# Altium PCB Diplomski.PcbDoc (part 1 of 2)
Units mm, origin at the board's own origin, x right, y up, seen from the top; angles counter-clockwise.
Board outline 40.1 x 36.5 mm, 4 copper layers (Top Layer, Layer 1, Layer 2, Bottom Layer), stack 1.592 mm thick; 128 components, 110 nets, 388 pads, 149 vias.
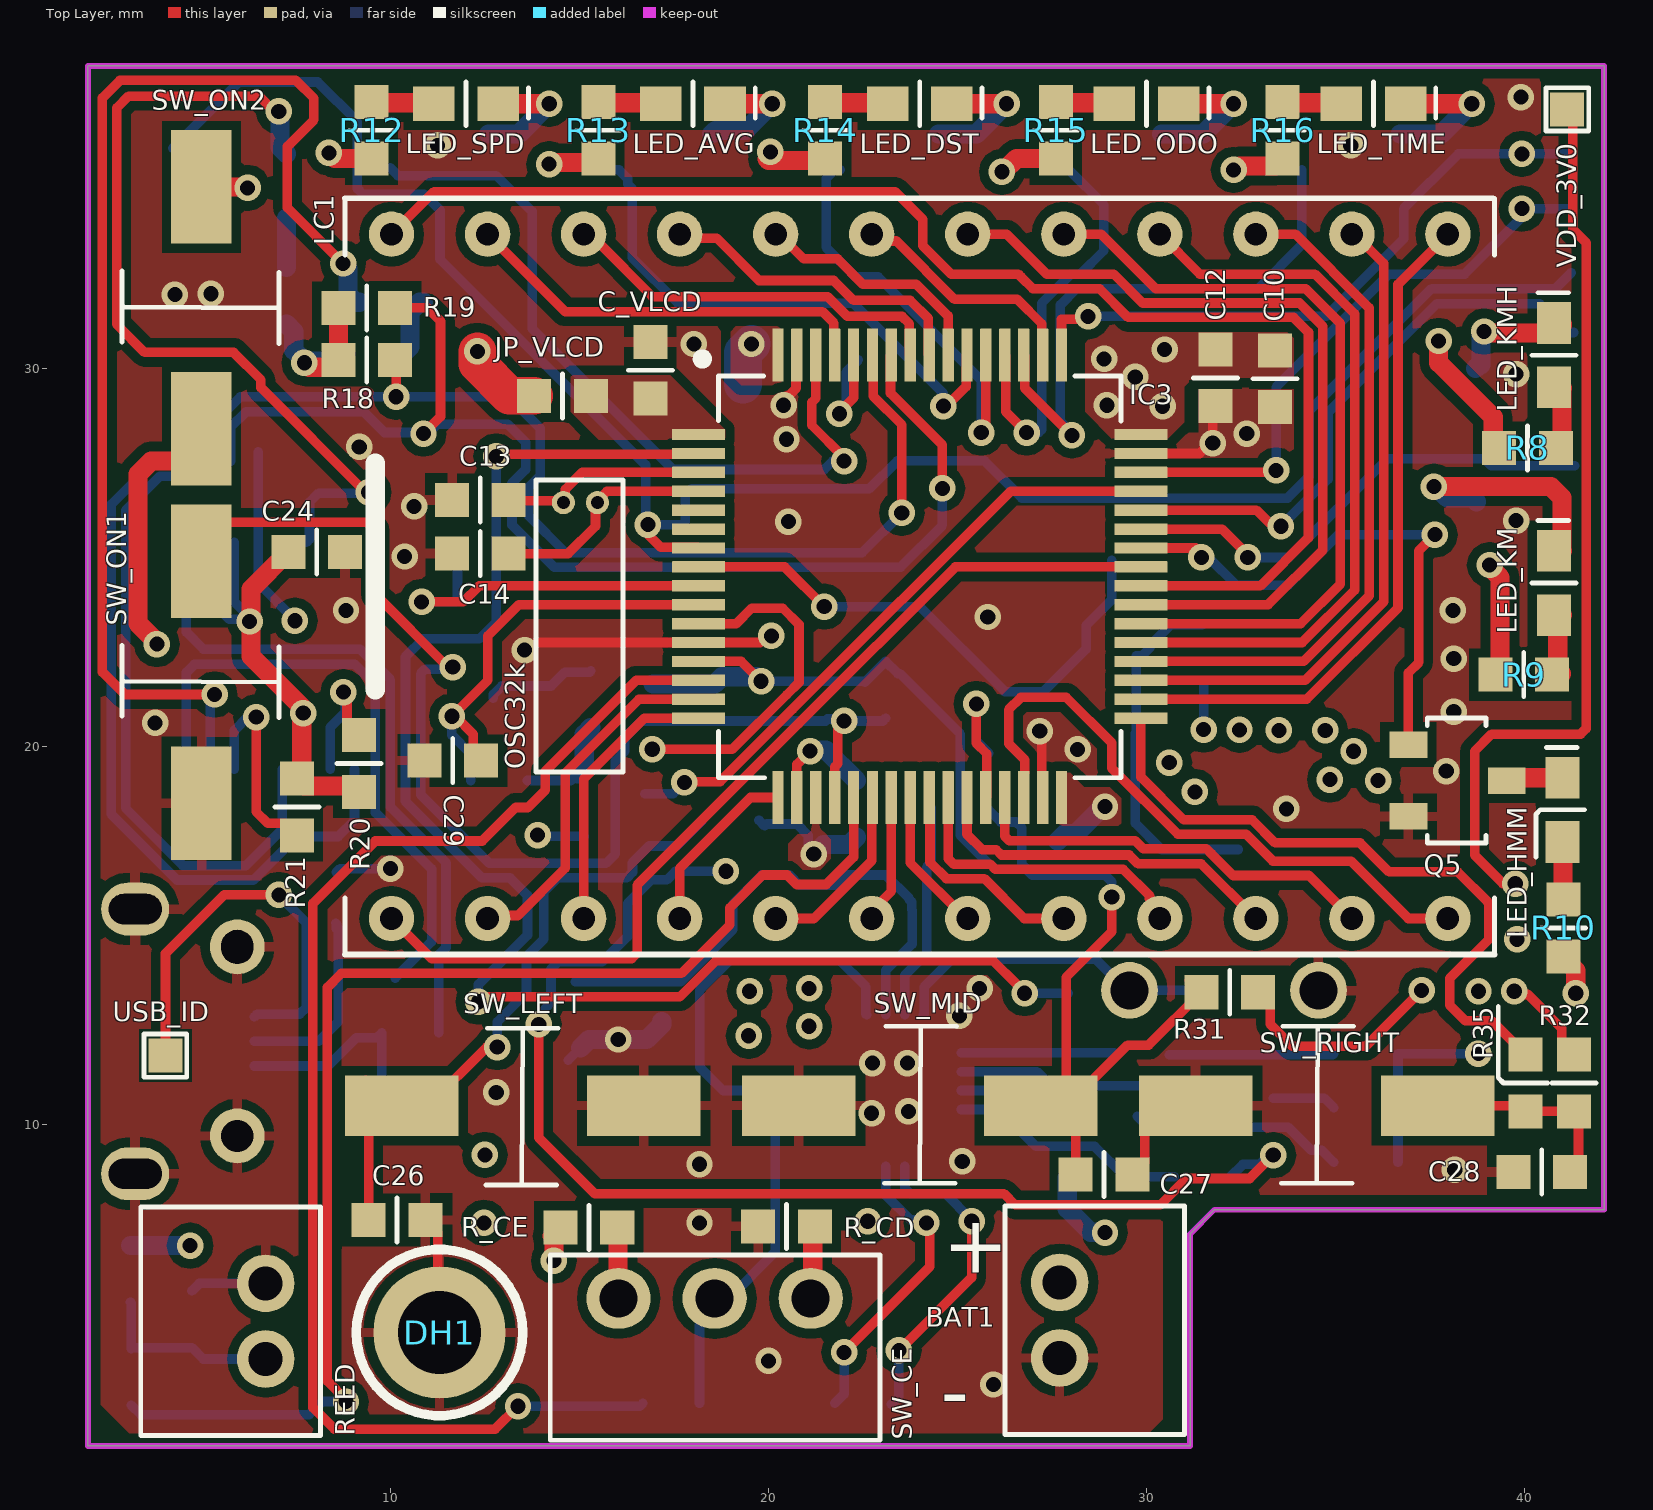
[diagram p0: Top Layer view]
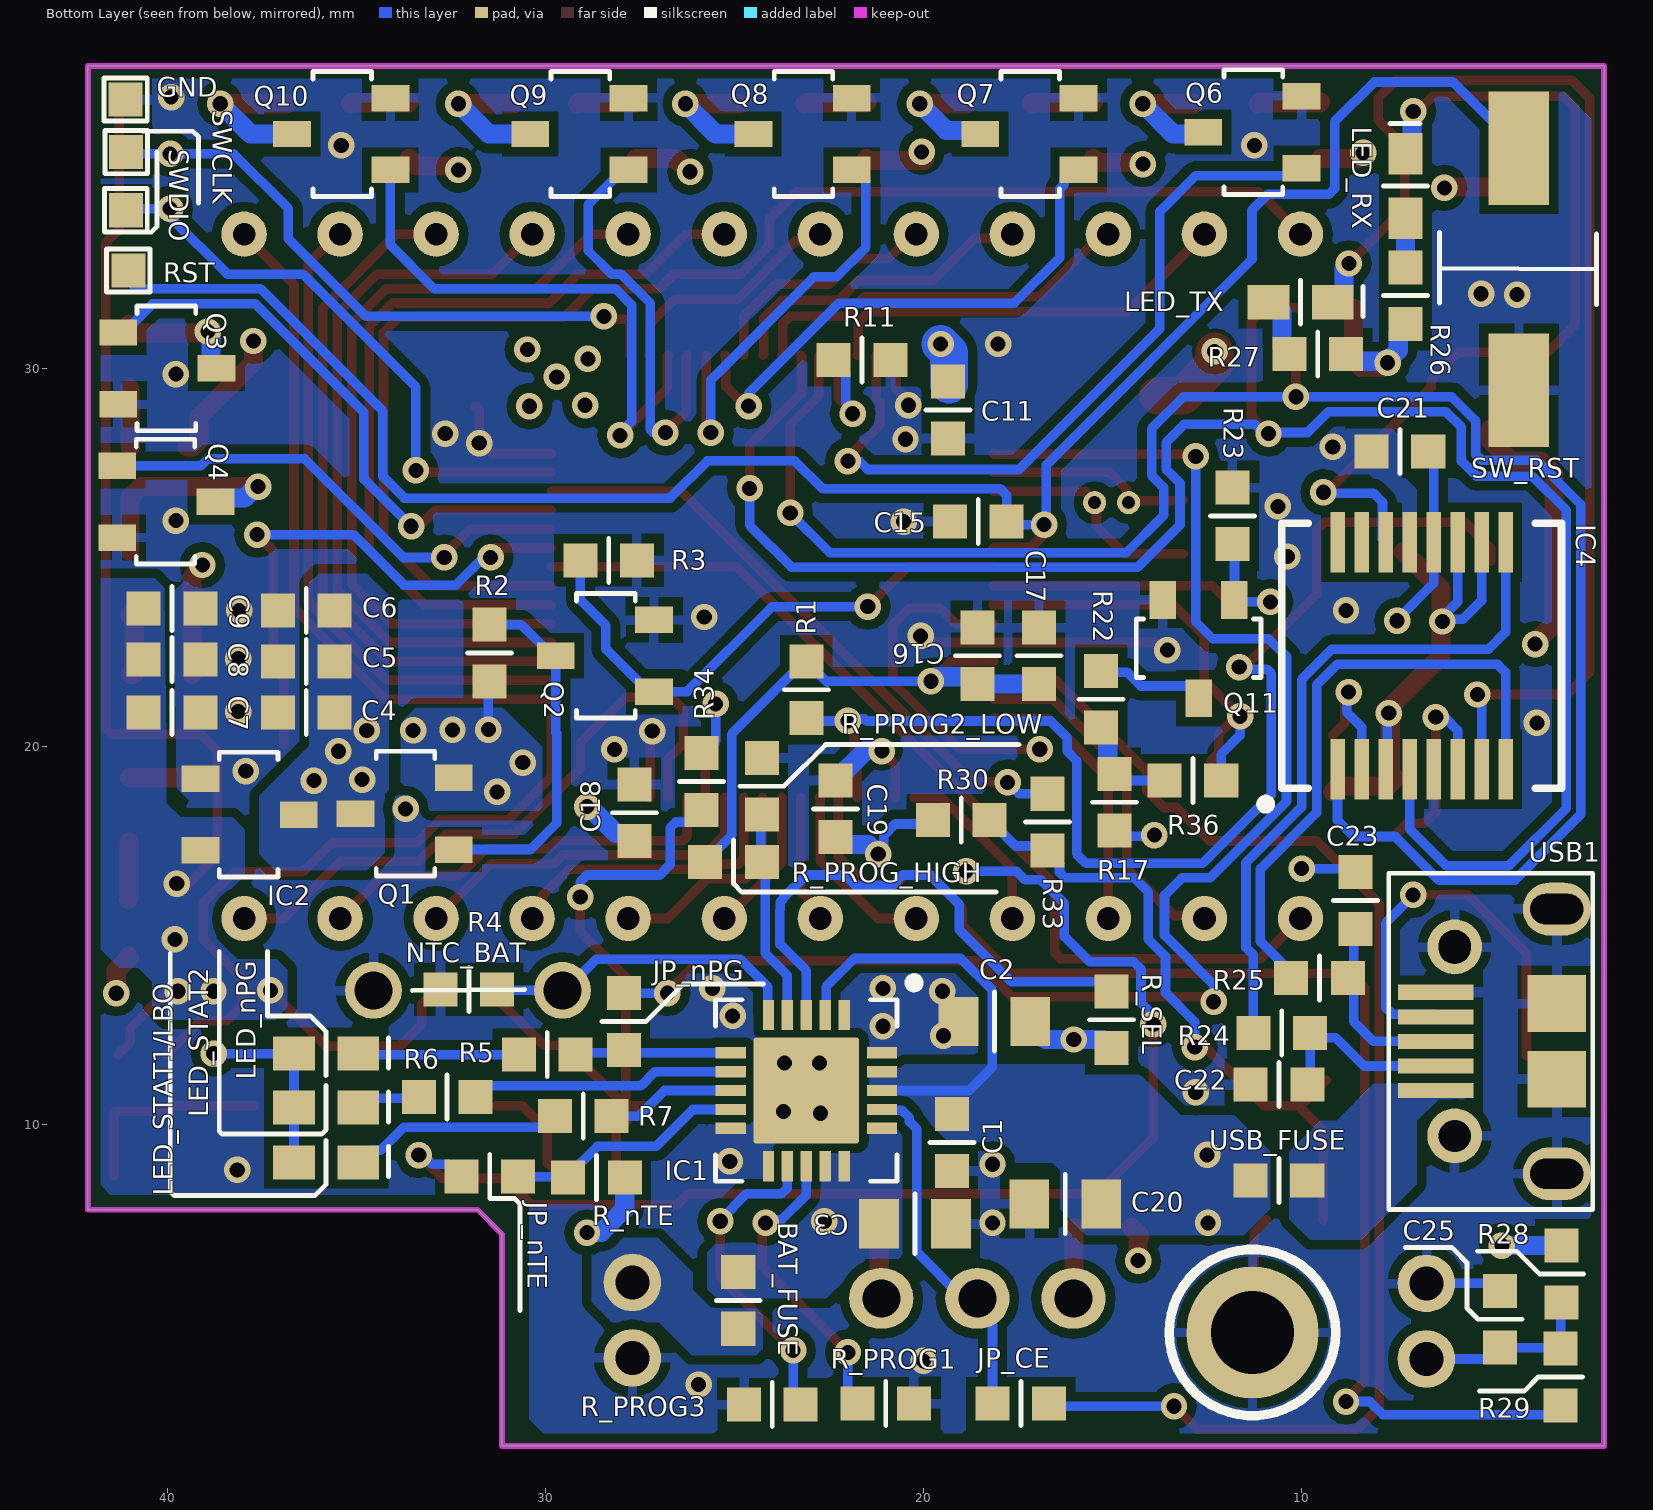
[diagram p1: Bottom Layer view, seen from below]
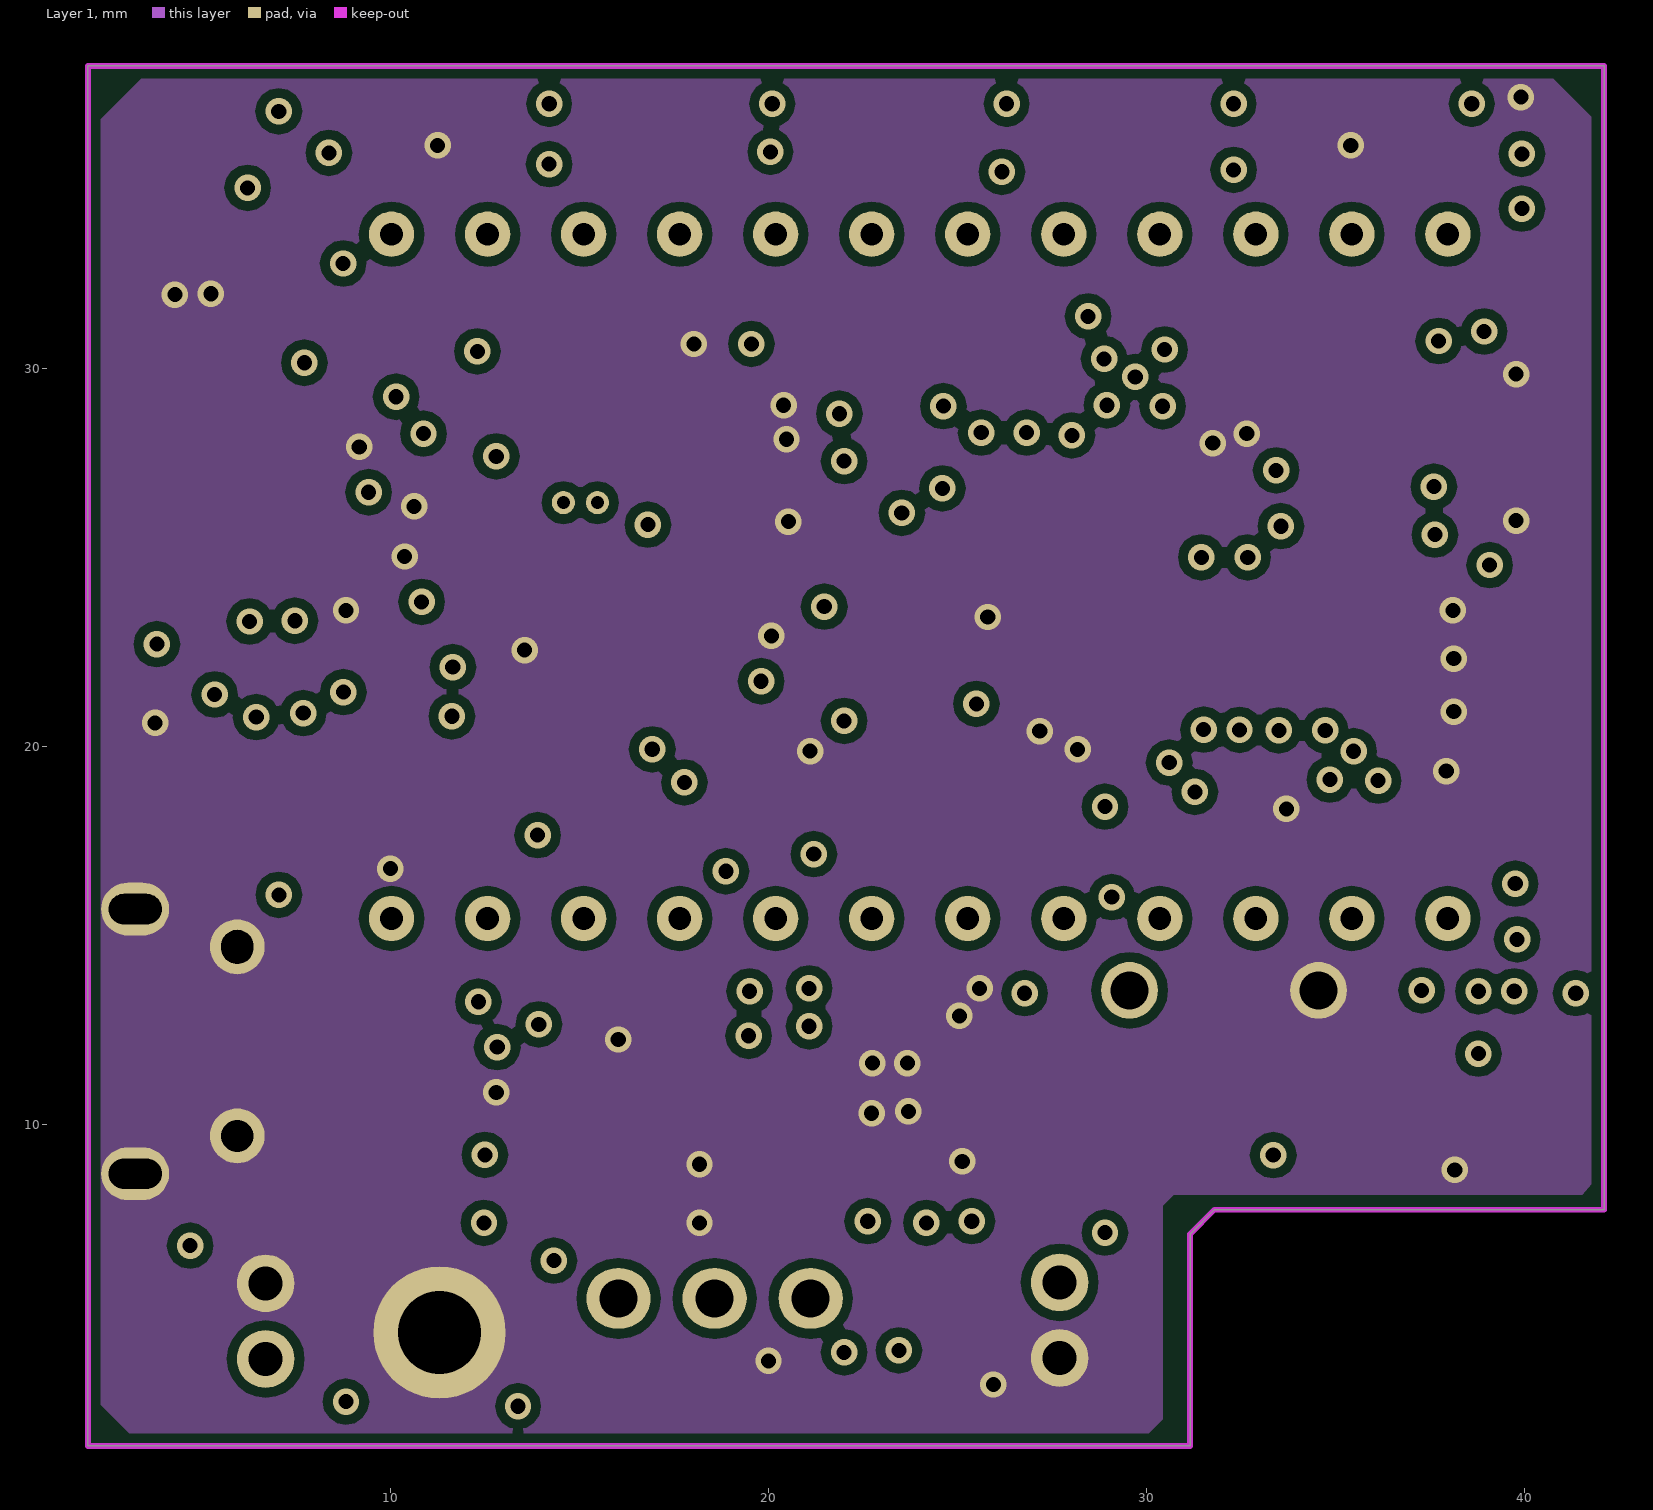
[diagram p2: Layer 1]
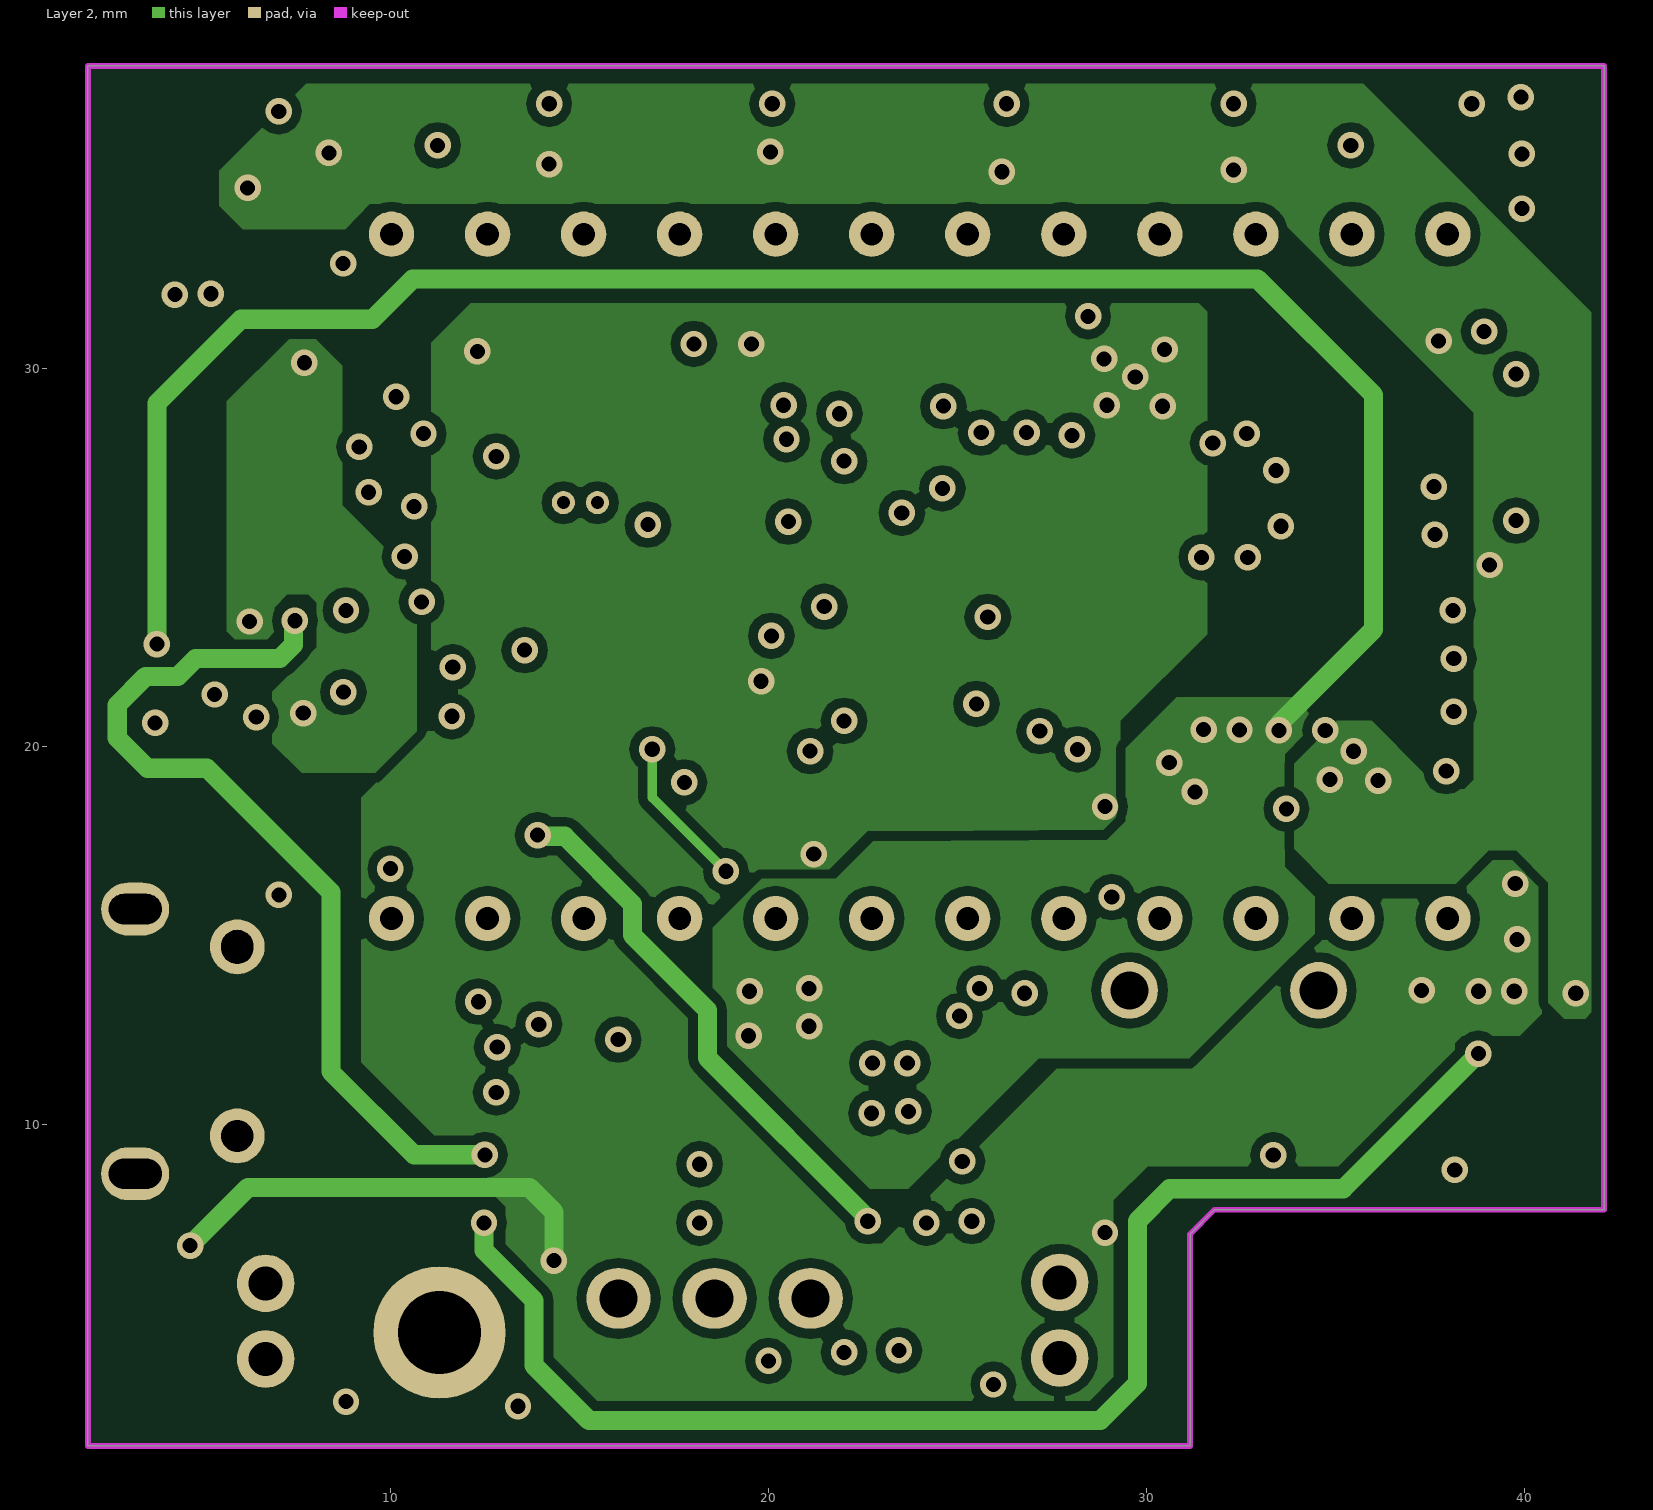
[diagram p3: Layer 2]
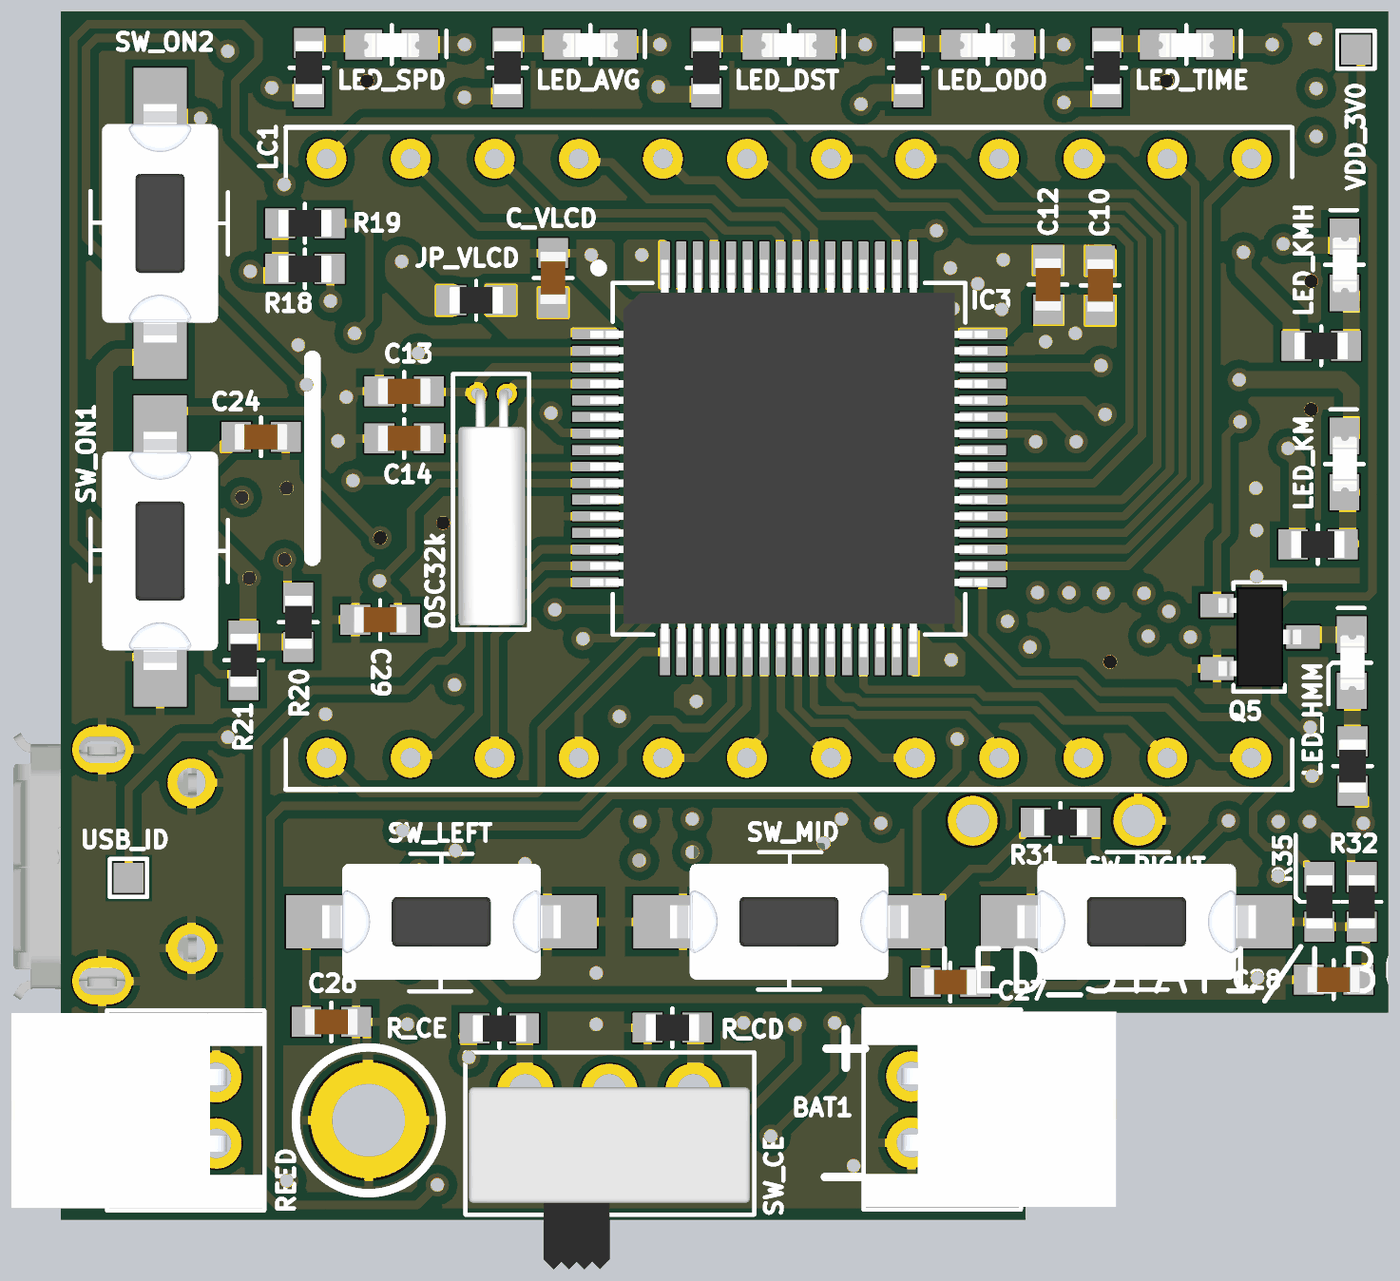
[diagram p5: 3D render of the assembled board from above, using the file's embedded part models]
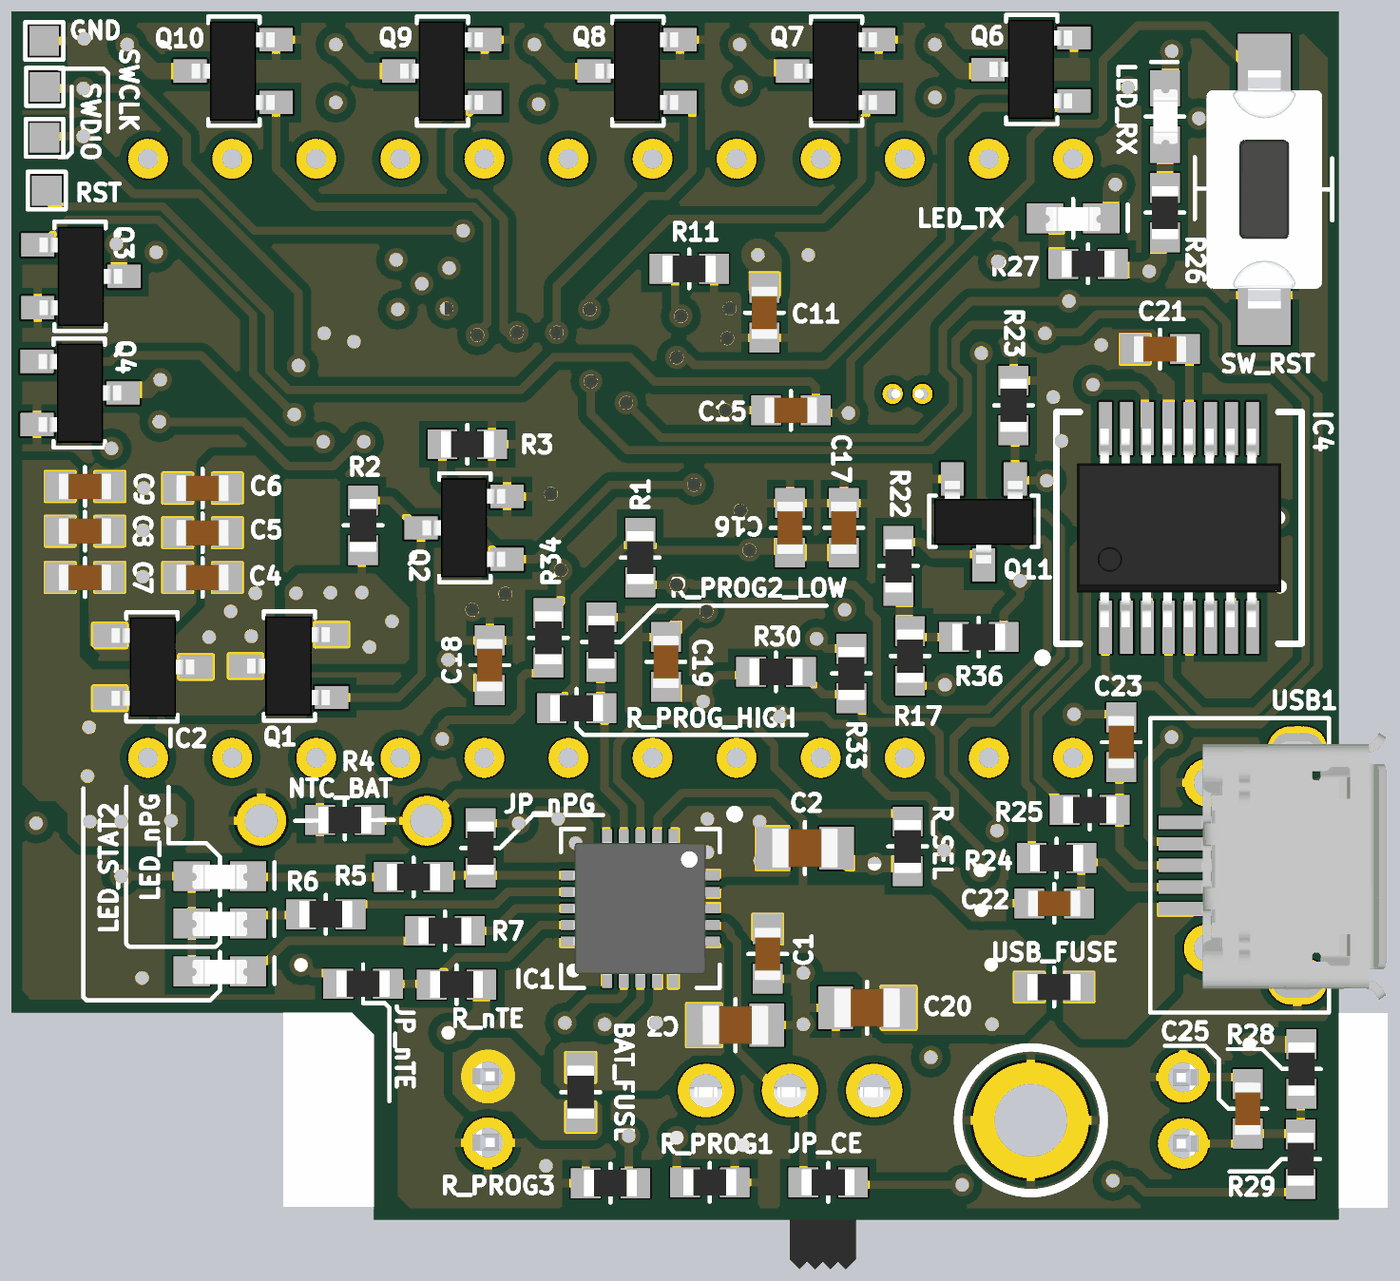
[diagram p6: 3D render of the assembled board from below, using the file's embedded part models]

## Layer stack, top to bottom
Top Solder: solder mask 0.0102, Solder Resist, Dk 3.5
Top Layer: signal copper 0.035
Dielectric 2: prepreg 0.2104, PP-006, Dk 4.1
Layer 1: signal copper 0.018
Dielectric 1: dielectric 1.065, FR-4, Dk 4.8
Layer 2: signal copper 0.018
Dielectric 3: prepreg 0.2104, PP-006, Dk 4.1
Bottom Layer: signal copper 0.035
Bottom Solder: solder mask 0.0102, Solder Resist, Dk 3.5

## Board outline
31.15,7.1 31.8,7.75 42.1,7.75 42.1,38 2,38 2,1.5 31.15,1.5

## Design rules (kind name [scope] priority, off if disabled: settings)
BoardOutlineClearance [All] p1: gap=0.254 ignorepadtopadclearanceinfootprint=FALSE except(0: Arc-SplitContinuation Track-SplitContinuation SMDPad-SplitContinuation THPad-SplitContinuation Via-SplitContinuation Fill-SplitContinuation Poly-SplitContinuation Region-SplitContinuation Text-SplitContinuation)
Clearance [All] p1: gap=0.127 ignorepadtopadclearanceinfootprint=TRUE except(0.2: Track-SMDPad; 0.254: Arc-Poly Track-THPad Track-Via Track-Poly SMDPad-Poly THPad-Poly Via-Poly Fill-Poly Poly-Poly; 0.5: THPad-THPad THPad-Hole Via-Via Via-Hole)
ComponentClearance "LCD Clearance" [All] p1: gap=0 collisioncheckmode=3 verticalgap=0 showdistances=FALSE
ComponentClearance [All] p2: gap=0.25 collisioncheckmode=3 verticalgap=0 showdistances=FALSE
DiffPairsRouting DiffPairsRouting_CANBUS1 [InDifferentialPairClass('CANBUS')] p1: maxlimit=0.127 minlimit=0.127 mostfreqgap=0.127 toplayer_minwidth=0.254 toplayer_maxwidth=0.254 toplayer_prefwidth=0.254 midlayer1_minwidth=0.254 midlayer1_maxwidth=0.254 midlayer1_prefwidth=0.254 midlayer2_minwidth=0.254 midlayer2_maxwidth=0.254 midlayer2_prefwidth=0.254 bottomlayer_minwidth=0.254 bottomlayer_maxwidth=0.254 bottomlayer_prefwidth=0.254 maxuncoupledlength=12.7
DiffPairsRouting [All] p2: maxlimit=0.203 minlimit=0.203 mostfreqgap=0.203 toplayer_minwidth=0.127 toplayer_maxwidth=0.127 toplayer_prefwidth=0.127 midlayer1_minwidth=0.127 midlayer1_maxwidth=0.127 midlayer1_prefwidth=0.127 midlayer2_minwidth=0.127 midlayer2_maxwidth=0.127 midlayer2_prefwidth=0.127 bottomlayer_minwidth=0.127 bottomlayer_maxwidth=0.127 bottomlayer_prefwidth=0.127 maxuncoupledlength=2.54
Height [All] p1: minheight=-50 maxheight=33 prefheight=12.5
HoleSize HoleSize-PTH [All] p1: absolutevalues=TRUE maxlimit=6.3 minlimit=0.2 maxpercent=80.000 minpercent=20.000
HoleToHoleClearance [All] p1: gap=0.5 allowstackedmicrovias=FALSE
MinimumAnnularRing "Minimum IAR" [((ObjectKind = 'Pad') OR (ObjectKind = 'Via')) And (Layer = 'MultiLayer')] p1: minimumring=0.13 // minimum inner annular ring for pads > 0.45mm finished hole size
MinimumSolderMaskSliver [All] p1: minsoldermaskwidth=0.1
PlaneClearance PlaneClearance-IPI [All] p1: clearance=0.25
PlaneConnect [All] p1: planeconnectstyle=Relief reliefexpansion=0.175 reliefentries=4 reliefconductorwidth=0.254 reliefairgap=0.178
PolygonConnect AIR_coil_poly_connect [All vs IsNamedPolygon('VDD_3V0_L01_P017')] p1: connectstyle=Direct reliefconductorwidth=0.254 reliefentries=4 polygonreliefangle="90 Angle" airgapwidth=0.254
PolygonConnect HV_SLAVE_Poly_Connect [InNetClass('HV_slave')] p2: connectstyle=Direct reliefconductorwidth=0.254 reliefentries=4 polygonreliefangle="90 Angle" airgapwidth=0.254
PolygonConnect gnd_top_bot_pour_connect [All vs (IsNamedPolygon('TOP_GND') OR IsNamedPolygon('BOT_GND'))] p3: thpad.connectstyle=Relief thpad.reliefconductorwidth=0.254 thpad.reliefentries=4 thpad.polygonreliefangle="90 Angle" thpad.airgapwidth=0.254 smdpad.connectstyle=Relief smdpad.reliefconductorwidth=0.254 smdpad.reliefentries=4 smdpad.polygonreliefangle="90 Angle" smdpad.airgapwidth=0.254 via.connectstyle=Direct via.reliefconductorwidth=0.254 via.reliefentries=4 via.polygonreliefangle="90 Angle" via.airgapwidth=0.254
PolygonConnect HVPolygonConnect [InNetClass('HV')] p4: connectstyle=Direct reliefconductorwidth=0.254 reliefentries=4 polygonreliefangle="90 Angle" airgapwidth=0.254
PolygonConnect PolygonConnect-xTW [All] p5: connectstyle=Direct reliefconductorwidth=0.508 reliefentries=4 polygonreliefangle="90 Angle" airgapwidth=0.254
RoutingCorners [All] p1: cornerstyle=45-Degree minsetback=2.5 maxsetback=2.5
RoutingVias [(ObjectKind = 'Via')] p1: holewidth=0.508 width=1.014 viastyle="Through Hole" minholewidth=0.254 minwidth=0.508 maxholewidth=15 maxwidth=30 // finishet hole size > 0.45mm
SilkToSilkClearance [All] p1: silktosilkclearance=0
SilkToSolderMaskClearance SilkscreenOverComponentPads [IsPad] p1: minsilkscreentomaskgap=0.15 clearancetoexposedcopper=FALSE
SolderMaskExpansion [All] p1: expansion=0.05 istentingtop=FALSE
UnRoutedNet [All] p1: checkbadconnections=TRUE
Width Width-xTW [All] p1: maxlimit=15 minlimit=0.127 preferedwidth=0.508 toplayer_prefwidth=0.254 midlayer1_minwidth=0.254 midlayer2_minwidth=0.254 bottomlayer_prefwidth=0.254 minimp=50.000000 maximp=50.000000 favimp=50.000000
18 further rules are at their usual default settings.

## Components (designator, comment, footprint, x,y, rotation, side; value= is the part's Value field where it differs from the comment)
BAT1 "2x1 2.00mm R/A" "JST R/A MALE 2x2.00MM" 27.7,5.825 r270 top
BAT_FUSE "0R" RES_0603 24.9,5.35 r90 bottom
C1 "10uF" CAP_0603 19.25,9.525 r270 bottom
C2 "4.7uF" CAP_0805 18.125,12.725 r180 bottom
C3 "4.7uF" CAP_0805 20.225,7.375 r180 bottom
C4 "100nF" CAP_0603 36.325,20.9 r0 bottom
C5 "100nF" CAP_0603 36.325,22.25 r0 bottom
C6 "1uF" CAP_0603 36.325,23.6 r0 bottom
C7 "100nF" CAP_0603 39.875,20.9 r180 bottom
C8 "100nF" CAP_0603 39.875,22.3 r180 bottom
C9 "1uF" CAP_0603 39.875,23.65 r180 bottom
C10 "10uF" CAP_0603 33.4,29.725 r270 top
C11 "100nF" CAP_0603 19.35,28.9 r270 bottom
C12 "100nF" CAP_0603 31.825,29.75 r270 top
C13 "4.7pF" CAP_0603 12.375,26.525 r180 top
C14 "4.7pF" CAP_0603 12.375,25.1 r180 top
C15 "100nF" CAP_0603 18.55,25.95 r0 bottom
C16 "100nF" CAP_0603 18.575,22.4 r90 bottom
C17 "1uF" CAP_0603 16.95,22.4 r90 bottom
C18 "100nF" CAP_0603 27.65,18.25 r90 bottom
C19 "100nF" CAP_0603 22.325,18.35 r270 bottom
C20 "4.7uF" CAP_0805 16.25,7.9 r0 bottom
C21 "100nF" CAP_0603 7.4,27.8 r0 bottom
C22 "47pF" CAP_0603 10.596,11.054 r0 bottom
C23 "47pF" CAP_0603 8.575,15.925 r90 bottom
C24 "100nF" CAP_0603 8.05,25.15 r0 top
C25 "10nF" CAP_0603 4.75,4.85 r90 bottom
C26 "10nF" CAP_0603 10.175,7.475 r0 top
C27 "10nF" CAP_0603 28.875,8.675 r0 top
C28 "10nF" CAP_0603 40.45,8.75 r180 top
C29 "100nF" CAP_0603 11.65,19.625 r180 top
C_VLCD "100nF" CAP_0603 16.875,29.95 r90 top
DH1 "M2_Distancer_Hole_2.2mm" "M2 DISTANCER HOLE" 11.3,4.5 r0 top
GND "Testpoint_SMD" Testpoint_SMD 41.105,37.114 r0 bottom
IC1 "BAT CHRG W/ PWR PATH SEL" "20-VFQFN EP (4mm x 4mm)" 23.1,10.9 r270 bottom
IC2 "LINREG 6VIN 3VOUT 250mA" SOT-23-3 37.825,18.2 r270 bottom
IC3 "MCU STM32L053R6T6" LQFP-64 24,24.5 r0 top
IC4 "USB to UART FT230XS" "SSOP-16 (3.90mm width)" 6.825,22.4 r90 bottom
JP_CE "0R" RES_0603 17.425,2.625 r180 bottom
JP_nPG "0R" RES_0603 27.925,12.725 r270 bottom
JP_nTE "0R" RES_0603 31.475,8.625 r180 bottom
JP_VLCD "0R" RES_0603 14.55,29.275 r180 top
LC1 "LCD 7SEG 3DGT" "24 pin 3 digit LCD (7.9mm character height)" 24,24.5 r0 top
LED_AVG "Red" LED_0603 18,37 r0 top
LED_DST "Red" LED_0603 24,37 r0 top
LED_HMM "Red" LED_0603 41,18.325 r90 top
LED_KM "Red" LED_0603 40.775,24.325 r90 top
LED_KMH "Red" LED_0603 40.775,30.35 r90 top
LED_nPG "Green" LED_0603 35.8,11.875 r180 bottom
LED_ODO "Red" LED_0603 30,37 r0 top
LED_RX "Green" LED_0603 7.25,34.825 r90 bottom
LED_SPD "Red" LED_0603 12,37 r0 top
LED_STAT1/LBO "Green" LED_0603 35.8,9 r180 bottom
LED_STAT2 "Green" LED_0603 35.8,10.45 r180 bottom
LED_TIME "Red" LED_0603 36,37 r0 top
LED_TX "Green" LED_0603 10.025,31.75 r180 bottom
NTC_BAT "10k NTC" "RES VERT TH 5MM" 32.05,13.55 r180 bottom
OSC32k "32.768kHz" "2x6mm cylindrical can - 0.7mm through hole" 15.025,26.45 r0 top
Q1 "TSM500P02CX PMOS" SOT-23-3 33.725,18.225 r90 bottom
Q2 "BSS138 NMOS" SOT-23-3 28.425,22.4 r90 bottom
Q3 "BSS138 NMOS" SOT-23-3 40,30 r270 bottom
Q4 "BSS138 NMOS" SOT-23-3 40.025,26.475 r270 bottom
Q5 "BSS138 NMOS" SOT-23-3 38.225,19.1 r270 top
Q6 "BSS138 NMOS" SOT-23-3 11.3,36.25 r90 bottom
Q7 "BSS138 NMOS" SOT-23-3 17.2,36.2 r90 bottom
Q8 "BSS138 NMOS" SOT-23-3 23.2,36.2 r90 bottom
Q9 "BSS138 NMOS" SOT-23-3 29.1,36.2 r90 bottom
Q10 "BSS138 NMOS" SOT-23-3 35.4,36.2 r90 bottom
Q11 "BSS138 NMOS" SOT-23-3 12.725,22.575 r0 bottom
R1 "10k" RES_0603 23.1,21.5 r90 bottom
R2 "10k" RES_0603 31.475,22.475 r270 bottom
R3 "10k" RES_0603 28.325,24.925 r0 bottom
R4 "10k" RES_0603 32.025,13.575 r180 bottom
R5 "470R" RES_0603 29.95,11.85 r180 bottom
R6 "470R" RES_0603 32.6,10.725 r180 bottom
R7 "470R" RES_0603 29,10.225 r180 bottom
R8 "150R" RES_0603 40.075,27.9 r180 top
R9 "150R" RES_0603 39.975,21.9 r180 top
R10 "150R" RES_0603 41.025,15.2 r270 top
R11 "10k" RES_0603 21.625,30.225 r180 bottom
R12 "150R" RES_0603 9.5,36.3 r270 top
R13 "150R" RES_0603 15.5,36.3 r270 top
R14 "150R" RES_0603 21.5,36.3 r270 top
R15 "150R" RES_0603 27.6,36.3 r270 top
R16 "150R" RES_0603 33.6,36.3 r270 top
R17 "10k" RES_0603 14.95,18.525 r270 bottom
R18 "10k" RES_0603 9.375,30.225 r180 top
R19 "10k" RES_0603 9.375,31.6 r180 top
R20 "10k" RES_0603 9.175,19.55 r270 top
R21 "10k" RES_0603 7.525,18.4 r90 top
R22 "22k" RES_0603 15.3,21.25 r270 bottom
R23 "10k" RES_0603 11.825,26.1 r270 bottom
R24 "27R" RES_0603 10.525,12.425 r0 bottom
R25 "27R" RES_0603 9.525,13.875 r0 bottom
R26 "470R" RES_0603 7.25,31.925 r270 bottom
R27 "470R" RES_0603 9.575,30.375 r180 bottom
R28 "10k" RES_0603 3.125,6.05 r90 bottom
R29 "10k" RES_0603 3.15,3.325 r90 bottom
R30 "10k" RES_0603 19,18.05 r0 bottom
R31 "10k" RES_0603 32.2,13.5 r0 top
R32 "10k" RES_0603 41.3,11.1 r90 top
R33 "10k" RES_0603 16.725,18 r270 bottom
R34 "10k" RES_0603 25.875,19.075 r270 bottom
R35 "10k" RES_0603 40.025,11.1 r270 top
R36 "10k" RES_0603 12.875,19.1 r0 bottom
R_CD "10k" RES_0603 20.475,7.3 r0 top
R_CE "10k" RES_0603 15.25,7.275 r0 top
R_nTE "10k" RES_0603 28.65,8.6 r180 bottom
R_PROG1 "10k" RES_0603 21,2.625 r0 bottom
R_PROG2_LOW "10k" RES_0603 24.275,18.95 r270 bottom
R_PROG3 "100k" RES_0603 24,2.6 r0 bottom
R_PROG_HIGH "10k" RES_0603 25.025,16.95 r0 bottom
R_SEL "10k" RES_0603 15.025,12.775 r90 bottom
REED "2x1 2.00mm R/A" "JST R/A MALE 2x2.00MM" 6.7,3.8 r90 top
RST "Testpoint_SMD" Testpoint_SMD 41.032,32.587 r180 bottom
SW_CE "Slide Switch ON-ON" "SWITCH SPDT 2.54MM R/A" 18.575,5.4 r0 top
SW_LEFT "SPST-NO" SWITCH_TACTILE_SMD_6X3.5mm_2pin 13.5,10.5 r180 top
SW_MID "SPST-NO" SWITCH_TACTILE_SMD_6X3.5mm_2pin 24,10.5 r0 top
SW_ON1 "SPST-NO" SWITCH_TACTILE_SMD_6X3.5mm_2pin 5,21.7 r90 top
SW_ON2 "SPST-NO" SWITCH_TACTILE_SMD_6X3.5mm_2pin 5,31.6 r90 top
SW_RIGHT "SPST-NO" SWITCH_TACTILE_SMD_6X3.5mm_2pin 34.5,10.5 r0 top
SW_RST "SPST-NO" SWITCH_TACTILE_SMD_6X3.5mm_2pin 4.25,32.625 r90 bottom
SWCLK "Testpoint_SMD" Testpoint_SMD 41.089,35.722 r270 bottom
SWDIO "Testpoint_SMD" Testpoint_SMD 41.1,34.183 r270 bottom
USB1 "Micro USB 5-pin" MicroUSB_5POS 3.25,12.2 r90 bottom
USB_FUSE "0R" RES_0603 10.6,8.525 r0 bottom
USB_ID "Testpoint_SMD" Testpoint_SMD 4.05,11.825 r90 top
VDD_3V0 "Testpoint_SMD" Testpoint_SMD 41.125,36.85 r270 top

## Footprints (in the part's own frame and the unit in brackets; to place one, negate y for a bottom-side part, rotate by r counter-clockwise, add the part's x,y. Pads: shape width x height; smd on the part's side, far side on the other; paste and mask are expansions set on the pad)
"2x6mm cylindrical can - 0.7mm through hole" [mm] "Oscillator housing cylinder 2-pin through hole"
  round 0.61 hole 0.35: 1(-0.45,0) 2(0.45,0)
  silkscreen extent -1.17,-7.12 1.12,0.6, body extent -1,-7 1,0.14, height 2.1
"20-VFQFN EP (4mm x 4mm)" [mm] "4mm x 4mm 20-pin VFQFN Exposed Pad"
  rrect5% 0.8x0.3 smd paste+0 mask+0.05: 1(-2,1) 2(-2,0.5) 3(-2,0) 4(-2,-0.5) 5(-2,-1) 11(2,-1) 12(2,-0.5) 13(2,0) 14(2,0.5) 15(2,1)
  rrect5% 0.3x0.8 smd paste+0 mask+0.05: 6(-1,-2) 7(-0.5,-2) 8(0,-2) 9(0.5,-2) 10(1,-2) 16(1,2) 17(0.5,2) 18(0,2) 19(-0.5,2) 20(-1,2)
  rrect5% 2.8x2.8 smd paste+0 mask+0.05: 21(0,0)
  silkscreen extent -2.98,-2.4 2.4,2.98, body extent -2,-2.01 2,1.99, height 0.92
"24 pin 3 digit LCD (7.9mm character height)" [mm] "Footprint for 24 pin LCD, 3 digit 7.9mm character height"
  round 1.2 hole 0.6: 1(-13.97,-9.05) 2(-11.43,-9.05) 3(-8.89,-9.05) 4(-6.35,-9.05) 5(-3.81,-9.05) 6(-1.27,-9.05) 7(1.27,-9.05) 8(3.81,-9.05) 9(6.35,-9.05) 10(8.89,-9.05) 11(11.43,-9.05) 12(13.97,-9.05) 13(13.97,9.05) 14(11.43,9.05) 15(8.89,9.05) 16(6.35,9.05) 17(3.81,9.05) 18(1.27,9.05) 19(-1.27,9.05) 20(-3.81,9.05) 21(-6.35,9.05) 22(-8.89,9.05) 23(-11.43,9.05) 24(-13.97,9.05)
  silkscreen extent -15.2,-10 15.2,10
CAP_0603 [mm] "Ceramic Capacitor SMD 0603"
  rect 0.9x0.9 smd mask+0.05: 1(-0.75,0) 2(0.75,0)
  silkscreen extent 0,-0.58 0,0.58, body extent -0.8,-0.4 0.8,0.4, height 0.6
CAP_0805 [mm] "Ceramic Capacitor SMD 0805"
  rect 1.05x1.3 smd mask+0.05: 1(-0.95,0) 2(0.95,0)
  silkscreen extent 0,-0.79 0,0.79, body extent -1,-0.6 1,0.6, height 1.2
"JST R/A MALE 2x2.00MM" [mil]
  round 60 hole 35.43: 1(0,0) 2(78.74,0)
  silkscreen extent -80,-57 158,130, body extent -77,-56 155,244, height 189
LED_0603 [mm] "LED SMD 0603"
  rect 1.1x0.9 smd mask+0.05: A(-0.85,0) K(0.85,0)
  silkscreen extent 0,-0.58 1.65,0.58, body extent -0.83,-0.38 0.83,0.34, height 0.68
LQFP-64 [mm]
  rrect5% 1.4x0.3 smd paste+0 mask+0.05: 1(-5.85,3.75) 2(-5.85,3.25) 3(-5.85,2.75) 4(-5.85,2.25) 5(-5.85,1.75) 6(-5.85,1.25) 7(-5.85,0.75) 8(-5.85,0.25) 9(-5.85,-0.25) 10(-5.85,-0.75) 11(-5.85,-1.25) 12(-5.85,-1.75) 13(-5.85,-2.25) 14(-5.85,-2.75) 15(-5.85,-3.25) 16(-5.85,-3.75) 33(5.85,-3.75) 34(5.85,-3.25) 35(5.85,-2.75) 36(5.85,-2.25) 37(5.85,-1.75) 38(5.85,-1.25) 39(5.85,-0.75) 40(5.85,-0.25) 41(5.85,0.25) 42(5.85,0.75) 43(5.85,1.25) 44(5.85,1.75) 45(5.85,2.25) 46(5.85,2.75) 47(5.85,3.25) 48(5.85,3.75)
  rrect5% 0.3x1.4 smd paste+0 mask+0.05: 17(-3.75,-5.85) 18(-3.25,-5.85) 19(-2.75,-5.85) 20(-2.25,-5.85) 21(-1.75,-5.85) 22(-1.25,-5.85) 23(-0.75,-5.85) 24(-0.25,-5.85) 25(0.25,-5.85) 26(0.75,-5.85) 27(1.25,-5.85) 28(1.75,-5.85) 29(2.25,-5.85) 30(2.75,-5.85) 31(3.25,-5.85) 32(3.75,-5.85) 49(3.75,5.85) 50(3.25,5.85) 51(2.75,5.85) 52(2.25,5.85) 53(1.75,5.85) 54(1.25,5.85) 55(0.75,5.85) 56(0.25,5.85) 57(-0.25,5.85) 58(-0.75,5.85) 59(-1.25,5.85) 60(-1.75,5.85) 61(-2.25,5.85) 62(-2.75,5.85) 63(-3.25,5.85) 64(-3.75,5.85)
  silkscreen extent -5.88,-5.33 5.33,5.88, body extent -6,-6 6,6, height 1.56
"M2 DISTANCER HOLE" [mm] "M2 screw hole"
  round 3.5 hole 2.2 mask+0.08: 1(0,0)
  silkscreen extent -2.2,-2.2 2.2,2.2
MicroUSB_5POS [mm] "USB Type B Micro Connector - 5 Pins"
  rect 0.4x2 smd: 1(-1.3,3.2) 2(-0.65,3.2) 3(0,3.2) 4(0.65,3.2) 5(1.3,3.2)
  round 1.45 hole 0.85: S1(-2.5,2.7)
  round 1.45 hole 0.85 slot 0.9 at 0 deg: S2(2.5,2.7)
  oval 1.4x1.8 hole 0.8 slot 1.4 at 90 deg: S3(-3.5,0) S6(3.5,0)
  rect 1.5x1.55 smd: S4(-1,0) S5(1,0)
  silkscreen extent -4.44,-0.95 4.45,4.45, body extent -4.06,-2.68 3.99,2.9, height 2.72
"RES VERT TH 5MM" [mm] "Resistor Axial Through Hole"
  round 1.5 hole 1 mask+0.08: 1(-2.5,0) 2(2.5,0)
  silkscreen extent -1.47,0 1.5,0.03
RES_0603 [mm] "Resistor SMD 0603"
  rect 0.9x0.9 smd mask+0.05: 1(-0.75,0) 2(0.75,0)
  silkscreen extent 0,-0.58 0,0.58, body extent -0.8,-0.4 0.8,0.4, height 0.45
SOT-23-3 [mm] "SOT-23-3 3-pin package"
  rect 0.7x1 smd mask+0.07: 1(-0.95,-1.3) 2(0.95,-1.3) 3(0,1.3)
  silkscreen extent -1.65,-0.8 1.65,0.75, body extent -1.5,-1.25 1.5,1.25, height 1.08
"SSOP-16 (3.90mm width)" [mm]
  rect 1.6x0.381 smd mask+0.07: 1(-3,2.223) 2(-3,1.588) 3(-3,0.953) 4(-3,0.318) 5(-3,-0.317) 6(-3,-0.953) 7(-3,-1.588) 8(-3,-2.223) 9(3,-2.223) 10(3,-1.588) 11(3,-0.953) 12(3,-0.318) 13(3,0.317) 14(3,0.952) 15(3,1.587) 16(3,2.222)
  silkscreen extent -4.05,-3.7 3.5,4.25, body extent -3,-3.09 3,3.09, height 1.63
"SWITCH SPDT 2.54MM R/A" [mm] "Pin Header Male Connector - 3 Pins (2.54mm)"
  oval 1.7x1.6 hole 1: 1(-2.54,0) 2(2.54,0) C(0,0)
  silkscreen extent -4.35,-3.75 4.38,1.15, body extent -4.25,-5.4 4.25,0.1, height 3.75
SWITCH_TACTILE_SMD_6X3.5mm_2pin [mm] "Tactile SMD switch 6x3.5mm 2pin"
  rect 3x1.6 smd mask+0.05: 1(-3.2,0) 2(3.2,0)
  silkscreen extent -0.94,-2.05 0.97,2.1, body extent -3.6,-1.75 3.6,1.75, height 5
Testpoint_SMD [mm]
  rect 0.9x0.9 smd mask+0.05: 1(0,0)
  silkscreen extent -0.57,-0.56 0.57,0.57

## Part data
BAT1 REED: library part CONN_JST_TH_R/A_2x1M_2.0mm, "Connector JST-PH through-hole right angle 2.0mm pitch", Manufacturer="JST Sales America Inc.", Manufacturer Part Number=S2B-PH-K-S, Mating Part Number=PHR-2, Supplier Part Number=16232, Supplier=Kelco
BAT_FUSE JP_CE JP_nPG JP_nTE JP_VLCD USB_FUSE: library part RES_0R_1%_0.1W_0603, "Resistor SMD 0603 0R 0.1W 1%", Manufacturer=n/a, Package=0603, Power Rating=0.1W, Supplier Part Number=13738, Tolerance=1%, Manufacturer Part Number=n/a, Resistance=0R, Supplier=Kelco
C1 C10: library part CAP_10uF_16V_0603, "Cermacic Capacitor 0603 16V 10uF", Dielectric class=n/a, Package=0603, Supplier Part Number=20214, Voltage Rating=16V, Capacitance=10uF, Manufacturer=n/a, Manufacturer Part Number=n/a, Supplier=Kelco, Tolerance=n/a
C2 C3 C20: library part CAP_4.7uF_25V_0805, "Cermacic Capacitor 0805 25V 4.7uF", Dielectric class=n/a, Package=0805, Supplier Part Number=20226, Voltage Rating=25v, Capacitance=4.7uF, Manufacturer=n/a, Manufacturer Part Number=n/a, Supplier=Kelco, Tolerance=n/a
C4 C5 C7 C8 C11 C12 C15 C16 C18 C19 C21 C24 C29 C_VLCD: library part CAP_100nF_50V_0603, "Cermacic Capacitor 0603 50V 100nF", Dielectric class=X7R, Manufacturer=n/a, Package=0603, Supplier Part Number=11061, Voltage Rating=50V, Capacitance=100nF, Manufacturer Part Number=n/a, Supplier=Kelco, Tolerance=n/a
C6 C9 C17: library part CAP_1uF_16V_0603, "Cermacic Capacitor 0603 16V 1uF", Dielectric class=Y5V, Manufacturer=n/a, Package=0603, Supplier Part Number=12930, Voltage Rating=16V, Capacitance=1uF, Manufacturer Part Number=n/a, Supplier=Kelco, Tolerance=n/a
C13 C14: library part CAP_4.7pF_63V_NPO_0603, "Ceramic Capacitor 0603 63V 4.7pF NPO", Dielectric class=NPO, Manufacturer=n/a, Package=0603, Supplier Part Number=14345, Voltage Rating=63V, Capacitance=4.7pF, Manufacturer Part Number=n/a, Supplier=Kelco, Tolerance=n/a
C22 C23: library part CAP_47pF_50V_0603, "Ceramic Capacitor 0603 50V 47pF NPO", Dielectric class=NPO, Manufacturer=n/a, Package=0603, Supplier Part Number=12902, Voltage Rating=50V, Capacitance=47pF, Manufacturer Part Number=n/a, Supplier=Kelco, Tolerance=n/a
C25 C26 C27 C28: library part CAP_10nF_63V_X7R_0603, "Cermacic Capacitor 0603 16V 10nF", Dielectric class=X7R, Manufacturer=n/a, Package=0603, Supplier Part Number=11586, Voltage Rating=63V, Capacitance=10nF, Manufacturer Part Number=n/a, Supplier=Kelco, Tolerance=n/a
DH1: "M2 Distancer hole"
IC1: library part IC_BATCHRG_PWRPATH_MCP73871, "Stand-Alone System Load Sharing and Li-Ion/Li-Polymer Battery Charge Management Controller / Battery charger with power path selection", Manufacturer=Microchip, Manufacturer Part Number=MCP73871-2CCI/ML, Operating Temperature="-40°C ~ +85°C", Package="20-VFQFN Exposed Pad", Quiescent Current=180uA, Supplier Part Number=MCP73871-2CCI/ML-ND, Supply Voltage="4.2V (battery), 6V (USB)", Supplier=Digikey
IC2: library part IC_LINREG_6V_3V_250mA_SOT23-3, "IC Linear Regulator Fixed 3V 250mA 6Vinmax SOT-23-3", Manufacturer="Diodes Incorporated", Manufacturer Part Number=AP2138N-3.0TRG1, Operating Temperature="-40°C ~ 85°C", Package=SOT-23-3, Quiescent Current=1uA, Supplier Part Number=AP2138N-3.0TRG1DICT-ND, Supply Voltage="6V (max)", ComponentLink1Description=Datasheet, ComponentLink1URL=https://www.diodes.com/assets/Datasheets/AP2138-9.pdf, Supplier=DigiKey
IC3: library part IC_MCU_STM32L053R6T6_64LQFP, "IC MCU STM32L053R6T6 LQFP-64", Manufacturer=STMicroelectronics, Manufacturer Part Number=STM32L053R6T6, Operating Temperature="-40°C ~ 85°C", Package=64-LQFP, Supplier Part Number=497-17898-ND, Supply Voltage="1.65 ~ 3.6V", Supplier=DigiKey
IC4: library part IC_USB_SERIAL_UART_FT230XS-R_16-SSOP, "USB 2.0 to UART interface", Manufacturer=FTDI, Manufacturer Part Number=FT230XS-R, Operating Temperature="-40°C ~ +85°C", Package="16-SSOP (3.90mm width)", Quiescent Current=125uA, Supplier Part Number=768-1135-1-ND, Supply Voltage="3V3~5V (1V8 ~ 3V3 VCCIO)", ComponentLink1Description=Datasheet, ComponentLink1URL=https://ftdichip.com/wp-content/uploads/2021/10/DS_FT230X.pdf, Supplier=Digikey
LC1: library part LCD_7SEG_3DIGIT_0.31in, "7 segment LCD display, 3 digits, 0.31in (7.9mm) character height. 3-5V", Manufacturer="Lumex Opto/Components Inc.", Manufacturer Part Number=LCD-S301C31TR, Operating Temperature="0°C ~ 80°C", Quiescent Current=1uA, Supplier Part Number=67-1788-ND, Supply Voltage=3~5VAC, Supplier=DigiKey
LED_AVG LED_DST LED_HMM LED_KM LED_KMH LED_ODO LED_SPD LED_TIME: library part LED_Red_2V_20mA_0603, "LED Diode SMD Green", Forward Current=20mA, Forward Voltage=2V, Manufacturer=n/a, Package=0603, Supplier Part Number=18012, Angle of Visibility=120deg, Color=Red, Intensity=120mCd, Manufacturer Part Number=n/a, Supplier=Kelco
LED_nPG LED_RX LED_STAT1/LBO LED_STAT2 LED_TX: library part LED_Green_3V_20mA_0603, "LED Diode SMD Green", Forward Current=20mA, Forward Voltage=3V, Manufacturer=n/a, Package=0603, Supplier Part Number=18013, Angle of Visibility=120deg, Color=Green, Intensity=120mCd, Manufacturer Part Number=n/a, Supplier=Kelco
NTC_BAT: library part THERM_NTC_10k_10%_0.25W_TH, "Thermistor NTC though-hole 10k @ 25degC 1/4W 10%", Manufacturer=n/a, Package=TH, Power Rating=0.25W, Supplier Part Number=4450, Tolerance=10%, ComponentLink1Description=Datasheet, ComponentLink1URL=https://www.tdk-electronics.tdk.com/inf/50/db/ntc/NTC_Leaded_disks_K164.pdf, Manufacturer Part Number=n/a, Resistance="10k NTC", Supplier=Kelco
OSC32k: library part OSCILLATOR_CRYSTAL_32.768kHz_DT26, "SMD Tactile switch 2 pin 6x3.5mm SPST-NO 5mm height", Load capacitance=12.5pF, Manufacturer=YIC, Manufacturer Part Number=32.768K26/DT26, Operating Temperature="0°C ~ 80°C", Package="DT-26 2x6mm Cylindrical can", Supplier Part Number=13808, ComponentLink1Description=Datasheet, Frequency=32.768kHz, Supplier=Kelco
Q1: library part MOSFET_P_20V_4.7A_TSM500P02CX_SOT-23, "MOSFET P-channel SMD TSM500P02CX", Manufacturer="Taiwan Semiconductor", Manufacturer Part Number=TSM500P02CX, Package=SOT-23-3, Supplier Part Number=18879, ComponentLink1Description=Datasheet, ComponentLink1URL=https://www.taiwansemi.com/assets/uploads/datasheet/TSM500P02CX_B1811.pdf, IDmax=4.7A, IDmax (pulse)=18.8A, PDmax=1.56W, RDSon=57mOhm, Supplier=Kelco, Transconductance gfs=7S, VDSmax=20V, VGSmax=10V, Vth=0.6V
Q2 Q3 Q4 Q5 Q6 Q7 Q8 Q9 Q10 Q11: library part MOSFET_N_60V_220mA_BSS138_SOT-23, "MOSFET N-channel SMD BSS138 220mA 50V", Manufacturer=ONsemi, Manufacturer Part Number=BSS138, Package=SOT-23-3, Supplier Part Number=19727, ComponentLink1Description=Datasheet, ComponentLink1URL=https://www.onsemi.com/pdf/datasheet/nds7002a-d.pdf, IDmax=220mA, IDmax (pulse)=880mA, PDmax=0.35W, RDSon=1Ohm, Supplier=Kelco, Transconductance gfs=0.5S, VDSmax=60V, VGSmax=20V, Vth=1.3V
R1 R2 R3 R4 R11 R17 R18 R19 R20 R21 R23 R28 R29 R30 R31 R32 R33 R34 R35 R36 R_CD R_CE R_nTE R_PROG1 R_PROG2_LOW R_PROG_HIGH R_SEL: library part RES_10k_1%_0.1W_0603, "Resistor SMD 0603 10k 0.1W 1%", Manufacturer=n/a, Package=0603, Power Rating=0.1W, Supplier Part Number=11702, Tolerance=1%, Manufacturer Part Number=n/a, Resistance=10k, Supplier=Kelco
R5 R6 R7 R26 R27: library part RES_470R_1%_0.1W_0603, "Resistor SMD 0603 0R 0.1W 1%", Manufacturer=n/a, Package=0603, Power Rating=0.1W, Supplier Part Number=8983, Tolerance=1%, Manufacturer Part Number=n/a, Resistance=470R, Supplier=Kelco
R8 R9 R10 R12 R13 R14 R15 R16: library part RES_150R_1%_0.1W_0603, "Resistor SMD 0603 100k 0.1W 1%", Manufacturer=n/a, Package=0603, Power Rating=0.1W, Supplier Part Number=14153, Tolerance=1%, Manufacturer Part Number=n/a, Resistance=150R, Supplier=Kelco
R22: library part RES_22k_1%_0.1W_0603, "Resistor SMD 0603 22k 0.1W 1%", Manufacturer=n/a, Package=0603, Power Rating=0.1W, Supplier Part Number=13741, Tolerance=1%, Manufacturer Part Number=n/a, Resistance=22k, Supplier=Kelco
R24 R25: library part RES_27R_1%_0.1W_0603, "Resistor SMD 0603 27R 0.1W 1%", Manufacturer=n/a, Package=0603, Power Rating=0.1W, Supplier Part Number=14163, Tolerance=1%, Manufacturer Part Number=n/a, Resistance=27R, Supplier=Kelco
R_PROG3: library part RES_100k_1%_0.1W_0603, "Resistor SMD 0603 100k 0.1W 1%", Manufacturer=n/a, Package=0603, Power Rating=0.1W, Supplier Part Number=11704, Tolerance=1%, Manufacturer Part Number=n/a, Resistance=100k, Supplier=Kelco
SW_CE: library part SWITCH_SLIDE_SPDT_ESP201_R/A_2.54mm, "Slide switch 2.54mm pitch Single Pole Double Throw (ON-ON) ESP201 Right Angle", Manufacturer=ECE, Manufacturer Part Number=ESP201, Rated Current=500mA, Rated Voltage=12VDC, Supplier Part Number=14323, Contact Configuration=SPDT, Orientation="Right Angle", Pitch=2.54mm, Supplier=Kelco
SW_LEFT SW_MID SW_ON1 SW_ON2 SW_RIGHT SW_RST: library part SWITCH_SMD_6X3.5mm_2pin, "SMD Tactile switch 2 pin 6x3.5mm SPST-NO 5mm height", Contact Resistance=100mOhm, Manufacturer=Diptronics, Manufacturer Part Number=DTSM-32N, Rated Current=50mA, Rated Voltage=12V, Supplier Part Number=15159, ComponentLink1Description=Datasheet, ComponentLink1URL=https://eu.mouser.com/datasheet/2/910/444_DTS-3-1571561.pdf, Contact form=SPST-NO, Supplier=Kelco
USB1: library part CONN_USB-TYPEB_MICRO, "Micro USB 5-pin connector", Manufacturer=MOLEX, Manufacturer Part Number=1050170001, Package="R/A microUSB", Supplier Part Number=18174, Supplier=Kelco

## Via types
v1: diameter 0.7, hole 0.4, Top Layer to Bottom Layer, tented both sides, 145 vias
v2: diameter 0.7, hole 0.4, Top Layer to Bottom Layer, tented top, 4 vias

## Nets (pads, with @x,y where several pads share a name; then routed paths per layer and width w, separated by ;. In a path a pad name is that pad's centre, name@x,y a point inside that pad or via, vN(x,y) a via of type N, cw(c..) or ccw(c..) an arc to the next point about the centre after c; other vN are vias at no path point)
AN_VBAT_MEAS: C29.1 IC3.10 R36.1 | length 11.9
  Top Layer w0.254: C29.1@12.4,19.625 12.189,19.836 12.189,20.329 11.718,20.8 v1(11.625,20.8) 12.575,21.75 12.575,22.925 13.4,23.75 IC3.10@18.15,23.75
  Bottom Layer w0.254: v1(11.625,20.8) 11.625,20.3 12.125,19.8 R36.1@12.125,19.1
CE: IC1.17 JP_CE.1 SW_CE.C | length 9.5
  Bottom Layer w0.254: JP_CE.1@18.175,2.625 18.175,4.686 18.575,5.086 SW_CE.C@18.575,5.4 18.95,5.4 20.175,6.625 20.175,9.88 20.373,10.078 20.373,10.181 20.569,10.377 21.077,10.377 IC1.17@21.1,10.4
D_BTN_LEFT: IC3.45 R33.1 | length 16.4
  Top Layer w0.254: v1(17.775,19.05) 17.795,19.07 18.722,19.07 20.64,20.988 26.402,26.75 IC3.45@29.85,26.75
  Bottom Layer w0.254: R33.1@16.725,18.75 17.475,18.75 v1(17.775,19.05)
D_BTN_MID: IC3.28 R34.1 | length 4
  Top Layer w0.254: v1(25.5,21.125) 25.5,20.081 25.773,19.808 25.773,18.673 IC3.28@25.75,18.65
  Bottom Layer w0.254: v1(25.5,21.125) 25.5,20.15 R34.1@25.825,19.825
D_BTN_ON: IC3.20 R1.1 SW_ON1.2 | length 32.7
  Top Layer w0.254: SW_ON1.2@5,24.9 5,25.254 5.673,25.927 9.385,25.927 9.412,25.9 9.425,25.9 9.6,25.725 9.6,24.016 11.516,22.1 v1(11.65,22.1) ; IC3.20@21.75,18.65 21.75,19.458 21.832,19.54 21.832,20.507 v1(22.001,20.676)
  Bottom Layer w0.254: v1@11.65,21.979 v1(11.65,22.1) 11.594,22.044 10.919,22.044 10.8,21.925 10.8,18.725 12.618,16.907 15.697,16.907 15.948,17.158 15.948,19.623 16.195,19.87 16.195,20.229 16.641,20.675 21.509,20.675 21.561,20.727 21.829,20.727 v1@21.881,20.675 ; v1(22.001,20.676) 21.882,20.676 v1@21.881,20.675 ; R1.1@23.1,20.75 23.025,20.675 v1@21.881,20.675
D_BTN_RIGHT: IC3.33 R35.1 | length 17.8
  Top Layer w0.254: IC3.33@29.85,20.75 29.85,19.194 30.982,18.062 32.788,18.062 33.4,17.45 35.65,17.45 36.415,16.685 38.23,16.685 39.027,15.888 39.027,15.873 39.05,15.85 39.05,14.9 38.021,13.871 38.021,13.154 38.425,12.75 39.125,12.75 R35.1@40.025,11.85
D_LED_AVG: IC3.54 Q7.1 | length 14.3
  Top Layer w0.254: v1(24.626,29.001) 24.709,29.001 25.227,29.519 25.227,30.327 IC3.54@25.25,30.35
  Bottom Layer w0.254: Q7.1@15.9,35.25 16.05,35.25 16.273,35.027 16.273,34.877 16.4,34.75 16.4,32.925 17.6,31.725 22.237,31.725 24.626,29.336 v1(24.626,29.001)
D_LED_DST: IC3.53 Q8.1 | length 11.3
  Top Layer w0.254: v1(25.626,28.301) 25.626,28.422 25.75,28.546 IC3.53@25.75,30.35
  Bottom Layer w0.254: Q8.1@21.9,35.25 21.75,35.25 21.527,35.027 21.527,34.877 21.525,34.875 21.525,33.2 22.3,32.425 22.9,32.425 25.626,29.699 v1(25.626,28.301)
D_LED_HMM: IC3.42 Q5.1 | length 14.8
  Top Layer w0.254: IC3.42@29.85,25.25 31.3,25.25 v1@31.625,24.925 ; Q5.1@36.925,20.05 36.925,21.95 37.2,22.225 37.2,25.179 v1(37.625,25.604)
  Bottom Layer w0.254: v1(31.452,25.001) 31.64,25.001 32.372,24.269 33.744,24.269 35.079,25.604 v1(37.625,25.604)
D_LED_KM: IC3.43 Q4.1 | length 13
  Top Layer w0.254: IC3.43@29.85,25.75 32,25.75 32.675,25.075 v1(32.675,25)
  Bottom Layer w0.254: v1(32.675,25) 33.759,25 36.365,27.606 38.931,27.606 39.112,27.425 Q4.1@41.325,27.425
D_LED_KMH: IC3.44 Q3.1 | length 15.6
  Top Layer w0.254: IC3.44@29.85,26.25 32.904,26.25 33.328,25.826 v1(33.552,25.826)
  Bottom Layer w0.254: v1(33.552,25.826) 33.633,25.746 33.633,25.908 34.8,27.075 34.8,28.834 37.674,31.708 40.392,31.708 41.15,30.95 Q3.1@41.3,30.95
D_LED_ODO: IC3.52 Q9.1 | length 10.9
  Top Layer w0.254: IC3.52@26.25,30.35 26.273,30.327 26.273,28.855 v1(26.826,28.301)
  Bottom Layer w0.254: v1(26.826,28.301) 27.142,28.301 27.225,28.384 27.225,31.723 27.991,32.489 28.243,32.489 28.867,33.112 28.867,34.333 27.95,35.25 Q9.1@27.8,35.25
D_LED_SPD: IC3.62 Q6.1 | length 20.4
  Top Layer w0.254: IC3.62@21.25,30.35 21.25,29.209 21.144,29.103 21.144,28.497 22,27.641 v1(22,27.55)
  Bottom Layer w0.254: Q6.1@10,35.3 10.2,35.1 12.8,35.1 13.75,34.15 13.75,31.05 17.475,27.325 21.475,27.325 21.7,27.55 v1(22,27.55)
D_LED_TIME: IC3.51 Q10.1 | length 15.3
  Top Layer w0.254: IC3.51@26.75,30.35 26.773,30.327 26.773,29.48 v1(28.026,28.226)
  Bottom Layer w0.254: v1(28.026,28.226) 28.026,28.289 27.72,28.595 27.72,31.679 28.149,32.108 32.942,32.108 34.1,33.265 Q10.1@34.1,35.25
D_PWR_CTRL: IC3.8 Q2.1 R3.2 | length 14.7
  Top Layer w0.254: IC3.8@18.15,24.75 20.425,24.75 v1(21.475,23.7)
  Bottom Layer w0.254: v1(21.475,23.7) 24,23.7 26.25,21.45 27.275,21.45 28.4,22.575 28.4,23.2 29.075,23.875 R3.2@29.075,24.925
D_REED_STATE: IC3.21 R29.1 | length 34.5
  Top Layer w0.254: v1(8.825,2.675) 8.825,2.721 8.331,3.215 8.331,13.631 8.7,14 17.695,14 18.975,15.28 18.975,15.73 19.845,16.6 20.494,16.6 20.744,16.351 ; 20.744,16.35 21.525,16.35 22.25,17.075 IC3.21@22.25,18.65
  Bottom Layer w0.254: R29.1@3.15,2.575 3.4,2.325 7.85,2.325 8.2,2.675 v1(8.825,2.675)
D_VBAT_MEAS_CTRL: IC3.9 Q11.1 R23.2 | length 10
  Top Layer w0.254: v1(10.825,23.825) 11.925,23.825 12.35,24.25 IC3.9@18.15,24.25
  Bottom Layer w0.254: v1(10.825,23.825) 11.725,23.825 Q11.1@11.775,23.875 11.775,25.3 R23.2@11.825,25.35
GND: BAT1.2 C1.2 C2.2 C3.2 C4.2 C5.2 C6.2 C7.2 C8.2 C9.2 C10.2 C11.2 C12.2 C13.2 C14.2 C15.2 C16.2 C17.2 C18.2 C19.1 C20.2 C21.2 C22.2 C23.2 C24.2 C25.2 C26.2 C27.2 C28.2 C29.2 C_VLCD.2 DH1.1 GND.1 IC1.10 IC1.11 IC1.21 IC2.1 IC3.12 IC3.18 IC3.31 IC3.47 IC3.63 IC4.5 IC4.13 NTC_BAT.1 Q2.2 Q3.2 Q4.2 Q5.2 Q6.2 Q7.2 Q8.2 Q9.2 Q10.2 Q11.2 R3.1 R4.1 R11.2 R23.1 R_CD.1 R_PROG1.1 R_PROG2_LOW.1 R_PROG3.2 R_SEL.1 REED.2 SW_LEFT.1 SW_MID.1 SW_ON1.1 SW_RIGHT.1 SW_RST.1 USB1.5 USB1.S1 USB1.S2 USB1.S3 USB1.S4 USB1.S5 USB1.S6 | length 28.5
  Top Layer w0.254: C26.2@10.925,7.475 11.248,7.152 11.248,4.552 DH1.1@11.3,4.5 ; v1(13.55,22.55) 13.671,22.55 13.871,22.75 IC3.12@18.15,22.75 19.779,22.75 19.954,22.925 v1(20.075,22.925) ; v1(20.401,29.026) 20.401,29.147 20.727,29.473 20.727,30.327 IC3.63@20.75,30.35 ; IC3.18@20.75,18.65 20.75,19.525 v1(21.101,19.876) ; v1(27.175,20.408) 27.227,20.356 27.227,18.673 IC3.31@27.25,18.65 ; C27.2@29.625,8.675 29.948,8.998 29.948,9.827 30.621,10.5 SW_RIGHT.1@31.3,10.5 ; IC3.47@29.85,27.75 31.404,27.75 31.629,27.975 31.75,27.975 31.75,28.925 C12.2@31.825,29 C12.2@31.85,28.975
  Bottom Layer w0.254: C25.2@4.75,5.6 4.95,5.8 REED.2@6.7,5.8 ; C23.2@8.575,16.675 8.669,16.769 v1(10,16.769) ; R_SEL.1@14.702,11.702 R_SEL.1@15.025,12.025
  Bottom Layer w0.508: R_SEL.1@15.025,12.025 15.25,12.25 v1(16.025,12.25) 16.777,12.25 17.175,12.648 C2.2@17.175,12.725 ; v1(21.101,19.876) 21.087,19.876 21.056,19.907 21.518,19.907 C19.1@22.325,19.1
  other v1: 25.95,3.125 20,3.75 18.175,7.4 38.15,8.8 18.175,8.95 25.125,9.025 12.8,10.85 25.05,12.875 25.582,13.603 33.7,18.35 37.925,19.35 28.175,19.925 3.775,20.625 38.125,20.925 38.125,22.325 25.8,23.425 8.825,23.6 38.1,23.6 10.375,25.025 20.525,25.95 39.775,25.975 10.625,26.35 9.175,27.925 31.75,28.025 20.476,28.126 32.65,28.275 39.775,29.85 18.025,30.646 4.3,31.95 5.25,31.975 11.25,35.9 35.4,35.9 39.9,37.175
  other v2: 22.725,10.3 23.7,10.35 22.75,11.625 23.675,11.625
LCD_COM0: IC3.41 LC1.1 | length 25.6
  Top Layer w0.254: LC1.1@10.03,15.45 11.089,14.391 16.376,14.391 16.525,14.54 16.525,16.334 20.798,20.607 24.941,24.75 IC3.41@29.85,24.75
LCD_SEG0_E1: IC3.15 LC1.2 | length 9.4
  Top Layer w0.254: LC1.2@12.57,15.45 12.649,15.529 13.37,15.529 14.625,16.784 14.625,19.3 16.575,21.25 IC3.15@18.142,21.25
LCD_SEG1_D1: IC3.16 LC1.3 | length 7.4
  Top Layer w0.254: LC1.3@15.11,15.45 15.11,19.144 16.716,20.75 IC3.16@18.15,20.75
LCD_SEG2_C1: IC3.17 LC1.4 | length 4.7
  Top Layer w0.254: LC1.4@17.65,15.45 17.65,16.775 19.525,18.65 IC3.17@20.25,18.65
LCD_SEG3_DP1: IC3.22 LC1.5 | length 4.9
  Top Layer w0.254: LC1.5@20.19,15.45 21.2,15.45 22.727,16.977 22.727,18.627 IC3.22@22.75,18.65
LCD_SEG4_E2: IC3.23 LC1.6 | length 3.4
  Top Layer w0.254: LC1.6@22.73,15.45 22.73,15.652 23.25,16.172 IC3.23@23.25,18.65
LCD_SEG5_DP2: IC3.26 LC1.9 | length 8.1
  Top Layer w0.254: IC3.26@24.75,18.65 24.75,18.004 24.75,17.037 24.899,16.888 25.866,16.888 26.004,16.749 29.383,16.749 30.076,16.056 30.076,15.98 30.35,15.706 LC1.9@30.35,15.45
LCD_SEG6_E3: IC3.27 LC1.10 | length 9.5
  Top Layer w0.254: IC3.27@25.25,18.65 25.25,17.675 25.656,17.269 26.023,17.269 26.162,17.13 29.541,17.13 29.776,16.895 31.445,16.895 LC1.10@32.89,15.45
LCD_SEG7_G2: IC3.55 LC1.20 | length 6.5
  Top Layer w0.254: LC1.20@20.19,33.55 20.277,33.55 20.927,32.9 21.825,32.9 22.5,32.225 23.911,32.225 24.75,31.386 IC3.55@24.75,30.35